# EAGLE board AK4493-Combi9 (EAGLE 9.6.2), part 1 of 2
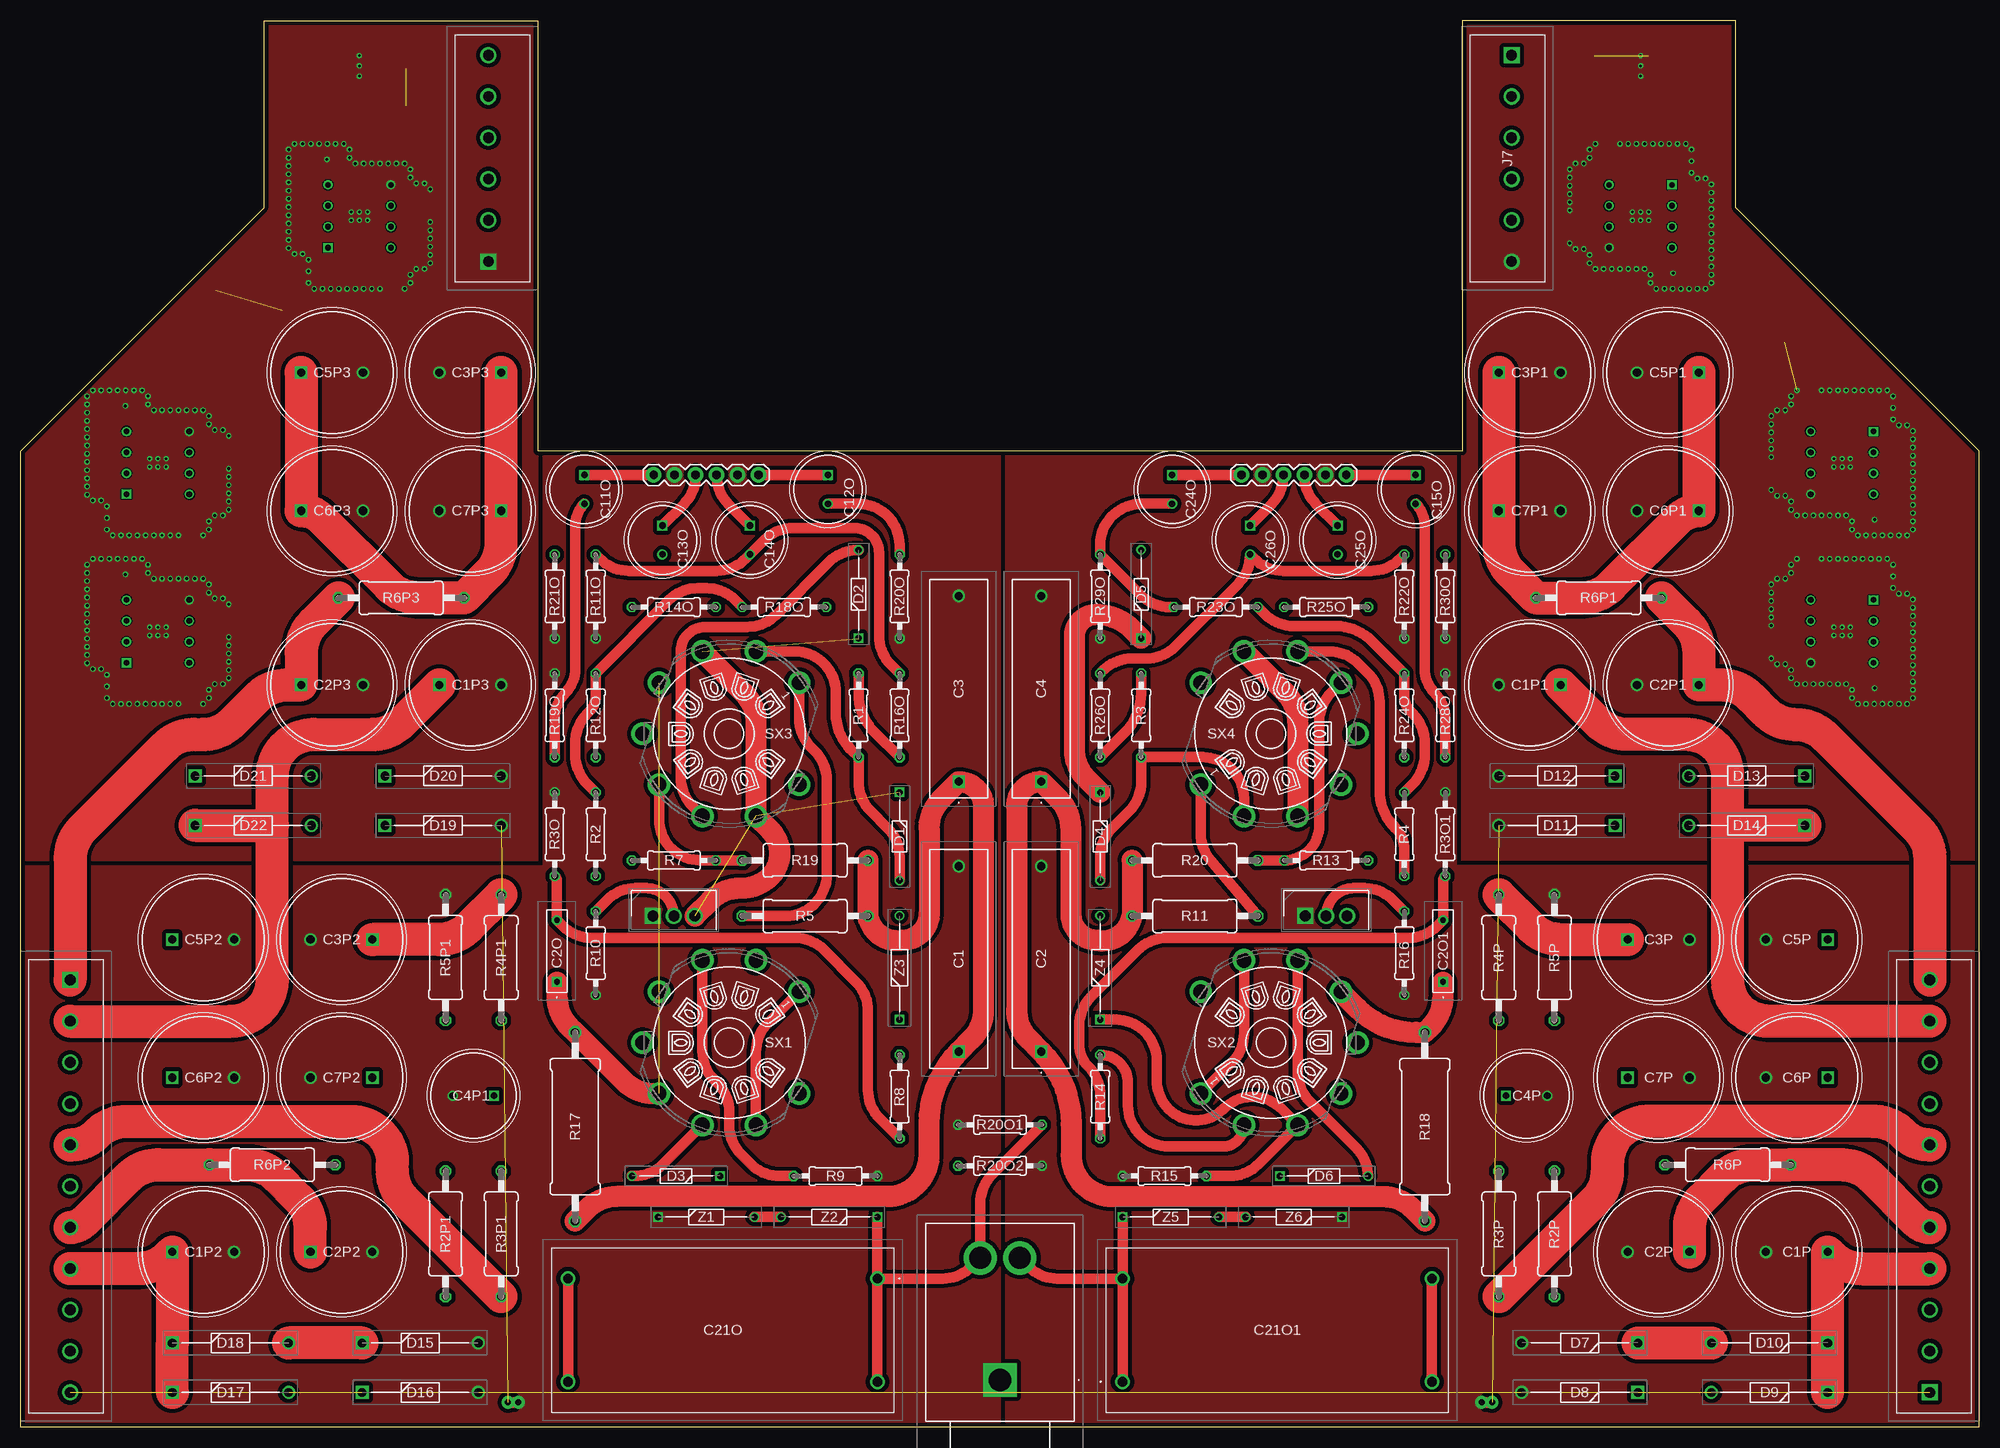
[diagram p0: board, top side]
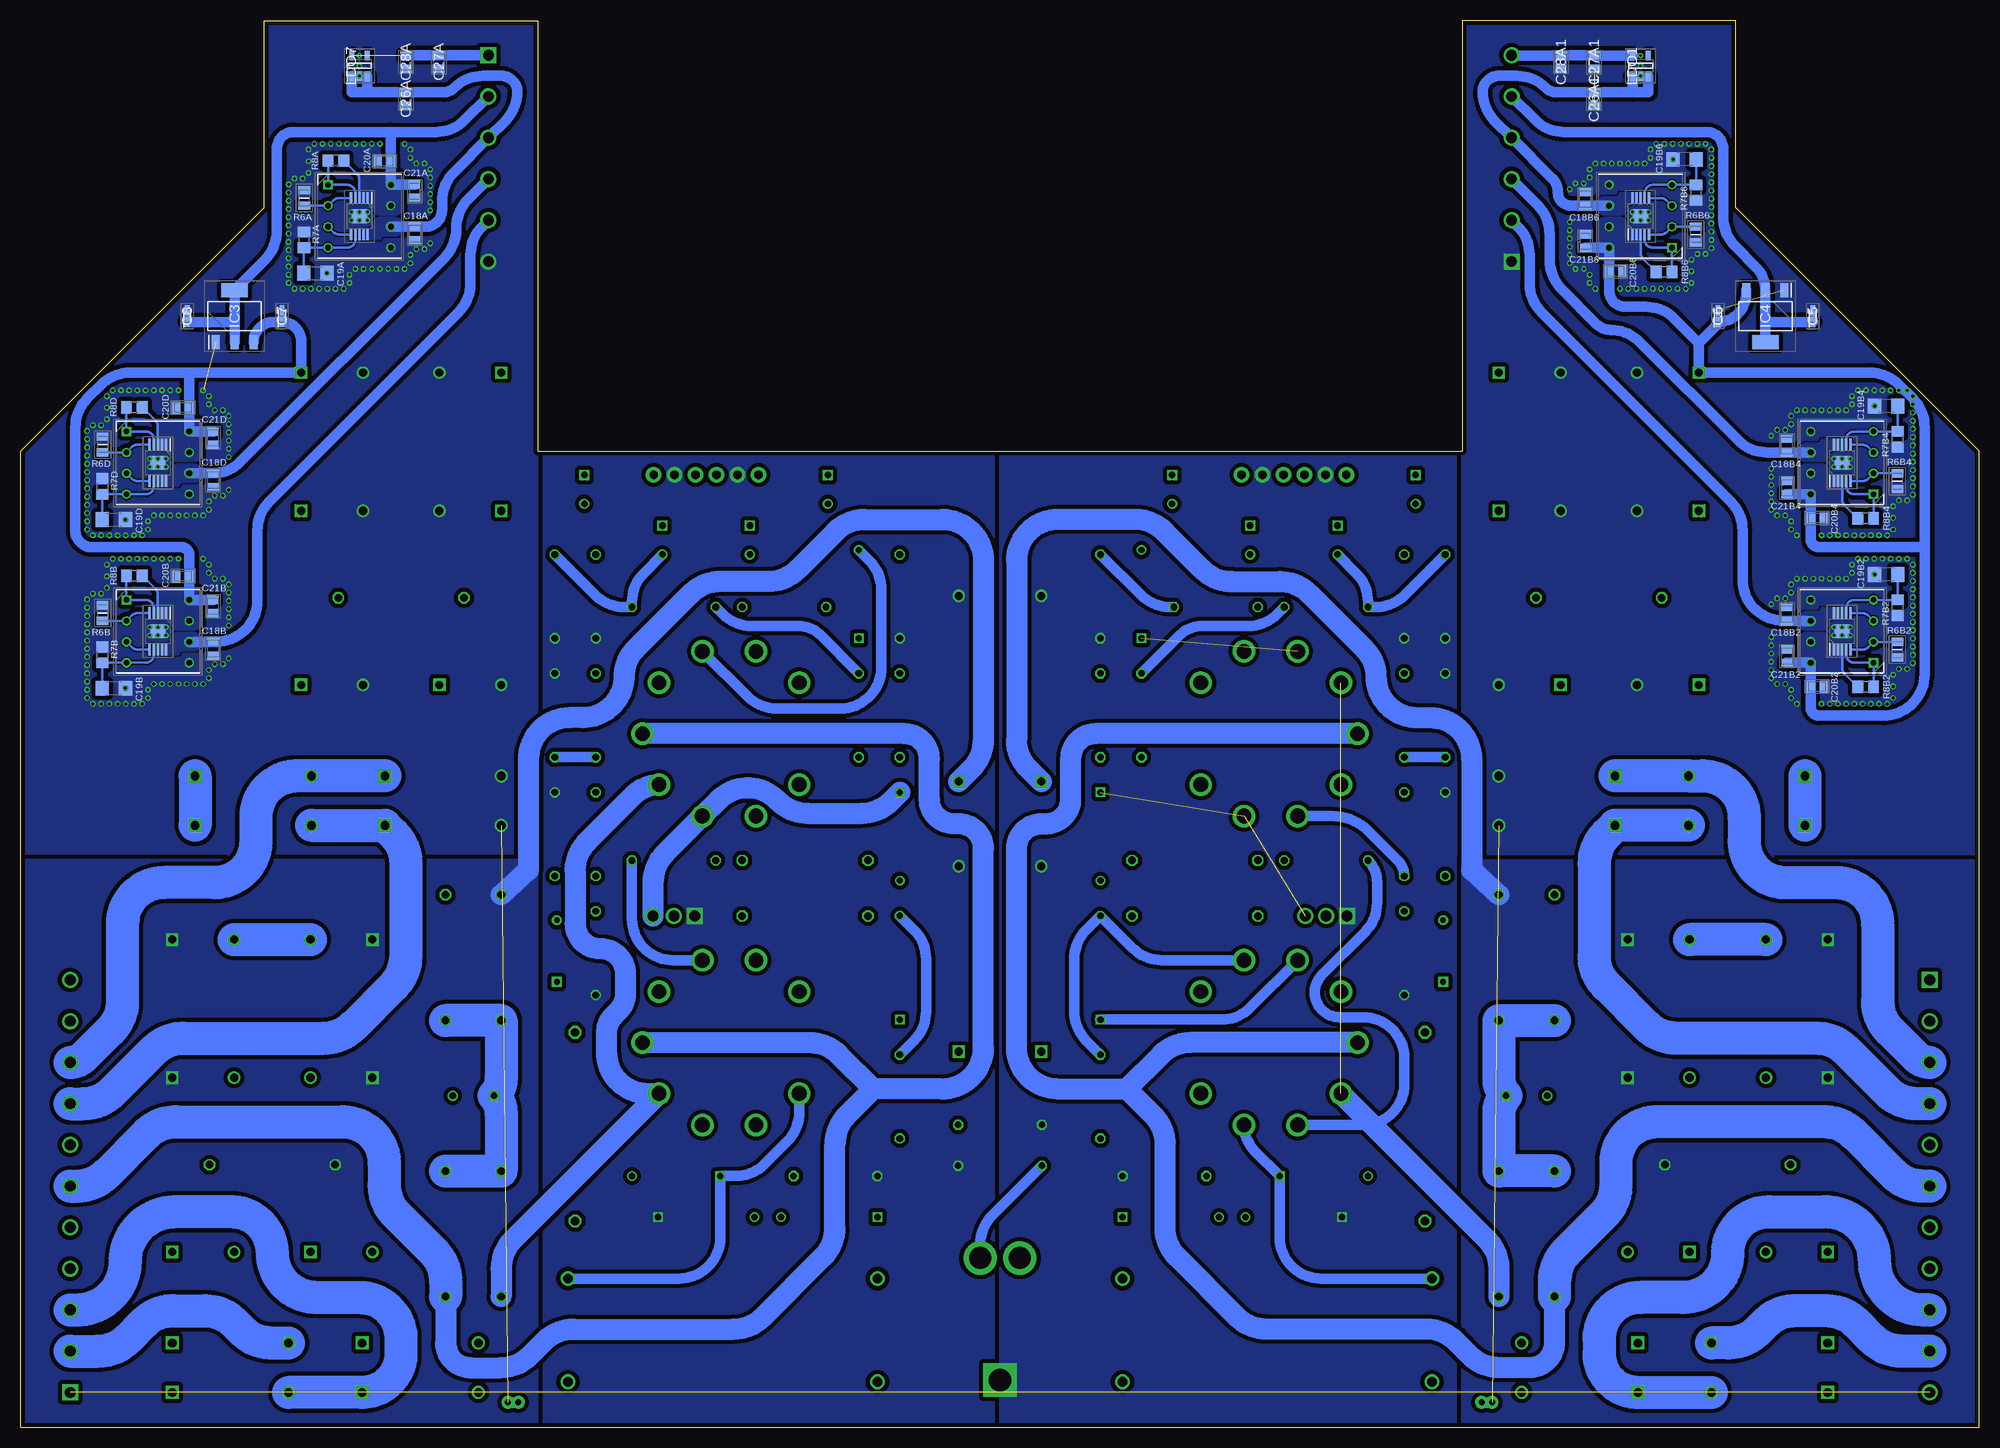
[diagram p1: board, bottom side, seen from below]

Size 237.38 x 170.5 mm. Coordinates in mm from the lower left corner, seen from the top.
Outline: 237.38,0 237.38,118.3 207.83,147.85 207.83,170.5 174.69,170.5 174.69,118.3 62.69,118.3 62.69,170.5 29.55,170.5 29.55,147.85 0,118.3 0,0 237.38,0
Copper layers (1*16): Top 0.035mm / dielectric 1.6mm / Bottom 0.035mm
Design rules "Elecrow_2-layer_PCB_eagle_rule": minimum track width 6mil, minimum drill 12mil, track to track 6mil, track to pad 6mil, pad to pad 6mil, via to via 8mil, smd to smd 0mil, copper to edge 20mil, drill to drill 10mil, minimum pad ring 6mil, minimum via ring 6mil, stop-mask expansion 0mil, vias tented up to drill 100mil, thermal gap 10mil
Net classes: 1 Signal: width 1.27 mm; 2 Power: width 2.54 mm

## Footprints (pad centres in the part's own frame; a part is rotated, then mirrored left to right if it is on the bottom)
MKP4G034705D00KSSD = drill 1 pad 1.5 square: 1 0,0 | drill 1 pad 1.5: 2 22.5,0
CAPPRD750W80D1475H4700 = drill 1 pad 1.5 square: 1 0,0 | drill 1 pad 1.5: 2 7.5,0
MKS4B031002A00JC00 = drill 0.7 pad 1.2 square: 1 0,0 | drill 0.7 pad 1.2: 2 7.5,0
CAPPRD500W60D1025H1750 = drill 0.8 pad 1.2 square: 1 0,0 | drill 0.8 pad 1.2: 2 5,0
CAPPM168X90N = smd 1.3 x 0.6: 1 -0.7,0; 2 0.7,0
CAPPRD350W60D825H1300 = drill 0.8 pad 1.2 square: 1 0,0 | drill 0.8 pad 1.2: 2 3.5,0
CAPC2013X140N = smd 0.96 x 1.44: 1 -0.82,0; 2 0.82,0
C1206 = smd 1.6 x 1.8: 1 -1.4,0; 2 1.4,0 | drill 0.35: DGND 1.4,0
CAPC2012X135N = smd 0.96 x 1.39: 1 -0.79,0; 2 0.79,0
DCP4G056007GD4KSSD = drill 1.2 pad 1.8: 1 0,0; 2 37.5,0; 3 37.5,12.5; 4 0,12.5
DIOAD1068W53L380D172 = drill 0.75 pad 1.15 square: 1 0,0 | drill 0.75 pad 1.15: 2 10.7,0
DIOAD1405W86L465D235 = drill 1.05 pad 1.575 square: 1 0,0 | drill 1.05 pad 1.575: 2 14.1,0
SOP50P490X110-11N = smd 1.425 x 0.3: 1 -2.212,1; 2 -2.212,0.5; 3 -2.212,0; 4 -2.212,-0.5; 5 -2.212,-1; 6 2.212,-1; 7 2.212,-0.5; 8 2.212,0; 9 2.212,0.5; 10 2.212,1 | smd 1.68 x 1.88: 11 0,0 | drill 0.305 pad 0.61: P$1 -0.498,0; P$2 0.498,0; P$3 -0.498,0.995; P$4 0.498,0.995; P$5 -0.498,-0.995; P$6 0.498,-0.995
SOT230P700X180-4N = smd 1.75 x 0.95: 1 -3.15,2.3; 2 -3.15,0; 3 -3.15,-2.3 | smd 1.75 x 3.2: 4 3.15,0
DIPS762W51P254L1016H390Q8N = drill 0.7 pad 1.1 square: 1 0,0 | drill 0.7 pad 1.1: 2 0,-2.54; 3 0,-5.08; 4 0,-7.62; 5 7.62,-7.62; 6 7.62,-5.08; 7 7.62,-2.54; 8 7.62,0
1X06 = drill 1.016 pad 1.88: 1 0,0; 2 2.54,0; 3 5.08,0; 4 7.62,0; 5 10.16,0; 6 12.7,0
SJ63033A = drill 2.69 pad 4.035 square: 1 0,0 | drill 2.69 pad 4.035: 2 14.8,-2.4; 3 14.8,2.4
1935255 = drill 1.3 pad 1.95 square: 1 0,0 | drill 1.3 pad 1.95: 2 5,0; 3 10,0; 4 15,0; 5 20,0; 6 25,0; 7 30,0; 8 35,0; 9 40,0; 10 45,0; 11 50,0
1935200 = drill 1.3 pad 1.95 square: 1 0,0 | drill 1.3 pad 1.95: 2 5,0; 3 10,0; 4 15,0; 5 20,0; 6 25,0
SOT95P280X145-5N = smd 1.2 x 0.6: 1 -1.25,0.95; 2 -1.25,0; 3 -1.25,-0.95; 4 1.25,-0.95; 5 1.25,0.95 | drill 0.305 pad 0.61: DGND -1.25,0; DGND2 0,0; DGND3 1.25,0
0207/10 = drill 0.813 octagon: 1 -5.08,0; 2 5.08,0
0411/15 = drill 0.914 octagon: 1 -7.62,0; 2 7.62,0
RESC2012X60N = smd 1 x 1.4: 1 -0.95,0; 2 0.95,0
R0805 = smd 1.3 x 1.5: 1 -0.95,0; 2 0.95,0
0617/22 = drill 1.016 octagon: 1 -11.43,0; 2 11.43,0
SHORT_ALL-50 = drill 0.737 pad 1.524: 1 -0.635,0; 2 0.635,0
VT9-PT = drill 1.8 pad 2.4: 1 6.172,8.495; 2 0,10.5; 3 -6.172,8.495; 4 -9.986,3.245; 5 -9.986,-3.245; 6 -6.172,-8.495; 7 0,-10.5; 8 6.172,-8.495; 9 9.986,-3.244
TO254P482X997X2018-3P = drill 1.29 pad 1.935 square: 1 0,0 | drill 1.29 pad 1.935: 2 2.54,0; 3 5.08,0
DIOAD1165W56L425D185 = drill 0.75 pad 1.15 square: 1 0,0 | drill 0.75 pad 1.15: 2 11.7,0
DIOAD1256W56L444D203 = drill 0.75 pad 1.15 square: 1 0,0 | drill 0.75 pad 1.15: 2 12.6,0

## Placement (x,y rotation side)
C1  MKP4G034705D00KSSD  [MKP4G034705D00KSSD]  113.69,45.5 90 top
C1P  68u  [CAPPRD750W80D1475H4700]  219,21.23 180 top
C1P1  68u  [CAPPRD750W80D1475H4700]  186.63,89.97 180 top
C1P2  68u  [CAPPRD750W80D1475H4700]  18.38,21.23 0 top
C1P3  68u  [CAPPRD750W80D1475H4700]  50.74,89.97 0 top
C2  MKP4G034705D00KSSD  [MKP4G034705D00KSSD]  123.69,45.5 90 top
C2O  0.1uF, 35V  [MKS4B031002A00JC00]  64.99,53.95 90 top
C2O1  0.1uF, 35V  [MKS4B031002A00JC00]  172.39,53.95 90 top
C2P  68u  [CAPPRD750W80D1475H4700]  202.25,21.23 180 top
C2P1  68u  [CAPPRD750W80D1475H4700]  203.38,89.97 180 top
C2P2  68u  [CAPPRD750W80D1475H4700]  35.12,21.23 0 top
C2P3  68u  [CAPPRD750W80D1475H4700]  33.99,89.97 0 top
C3  MKP4G034705D00KSSD  [MKP4G034705D00KSSD]  113.69,78.25 90 top
C3P  68u  [CAPPRD750W80D1475H4700]  194.75,59.1 0 top
C3P1  68u  [CAPPRD750W80D1475H4700]  179.13,127.83 0 top
C3P2  68u  [CAPPRD750W80D1475H4700]  42.62,59.1 180 top
C3P3  68u  [CAPPRD750W80D1475H4700]  58.24,127.83 180 top
C4  MKP4G034705D00KSSD  [MKP4G034705D00KSSD]  123.69,78.25 90 top
C4P  UCY2E220MPD1TD  [CAPPRD500W60D1025H1750]  180,40.16 0 top
C4P1  UCY2E220MPD1TD  [CAPPRD500W60D1025H1750]  57.37,40.16 180 top
C5  TCM1A106M8R  [CAPPM168X90N]  20.19,134.68 90 bottom
C5P  68u  [CAPPRD750W80D1475H4700]  219,59.1 180 top
C5P1  68u  [CAPPRD750W80D1475H4700]  203.38,127.83 180 top
C5P2  68u  [CAPPRD750W80D1475H4700]  18.38,59.1 0 top
C5P3  68u  [CAPPRD750W80D1475H4700]  33.99,127.83 0 top
C6  TCM1A106M8R  [CAPPM168X90N]  31.68,134.68 90 bottom
C6P  68u  [CAPPRD750W80D1475H4700]  219,42.35 180 top
C6P1  68u  [CAPPRD750W80D1475H4700]  203.38,111.08 180 top
C6P2  68u  [CAPPRD750W80D1475H4700]  18.38,42.35 0 top
C6P3  68u  [CAPPRD750W80D1475H4700]  33.99,111.08 0 top
C7  TCM1A106M8R  [CAPPM168X90N]  205.7,134.68 90 bottom
C7P  68u  [CAPPRD750W80D1475H4700]  194.75,42.35 0 top
C7P1  68u  [CAPPRD750W80D1475H4700]  179.13,111.08 0 top
C7P2  68u  [CAPPRD750W80D1475H4700]  42.62,42.35 180 top
C7P3  68u  [CAPPRD750W80D1475H4700]  58.24,111.08 180 top
C8  TCM1A106M8R  [CAPPM168X90N]  217.19,134.68 90 bottom
C11O  100uF  [CAPPRD350W60D825H1300]  68.31,115.42 270 top
C12O  100uF  [CAPPRD350W60D825H1300]  97.84,115.42 270 top
C13O  100uF  [CAPPRD350W60D825H1300]  77.77,109.28 270 top
C14O  100uF  [CAPPRD350W60D825H1300]  88.38,109.28 270 top
C15O  100uF  [CAPPRD350W60D825H1300]  169.06,115.42 270 top
C18A  4.7u  [CAPC2013X140N]  189.62,144.69 270 bottom
C18B  4.7u  [CAPC2013X140N]  214.05,94.37 270 bottom
C18B2  4.7u  [CAPC2013X140N]  23.33,98.55 90 bottom
C18B4  4.7u  [CAPC2013X140N]  23.33,118.98 90 bottom
C18B6  4.7u  [CAPC2013X140N]  47.75,148.87 90 bottom
C18D  4.7u  [CAPC2013X140N]  214.05,114.8 270 bottom
C19A  22u  [C1206]  201.66,139.89 0 bottom
C19B  22u  [C1206]  226.08,89.57 0 bottom
C19B2  22u  [C1206]  11.3,103.36 180 bottom
C19B4  22u  [C1206]  11.3,123.78 180 bottom
C19B6  22u  [C1206]  35.72,153.68 180 bottom
C19D  22u  [C1206]  226.08,109.99 0 bottom
C20A  10u  [CAPC2012X135N]  193.29,153.47 180 bottom
C20B  10u  [CAPC2012X135N]  217.72,103.16 180 bottom
C20B2  10u  [CAPC2012X135N]  19.66,89.77 0 bottom
C20B4  10u  [CAPC2012X135N]  19.66,110.2 0 bottom
C20B6  10u  [CAPC2012X135N]  44.08,140.09 0 bottom
C20D  10u  [CAPC2012X135N]  217.72,123.58 180 bottom
C21A  0.1u  [CAPC2012X135N]  189.62,149.8 270 bottom
C21B  0.1u  [CAPC2012X135N]  214.05,99.48 270 bottom
C21B2  0.1u  [CAPC2012X135N]  23.33,93.44 90 bottom
C21B4  0.1u  [CAPC2012X135N]  23.33,113.87 90 bottom
C21B6  0.1u  [CAPC2012X135N]  47.75,143.76 90 bottom
C21D  0.1u  [CAPC2012X135N]  214.05,119.91 270 bottom
C21O  30uF/400V  [DCP4G056007GD4KSSD]  103.84,18 180 top
C21O1  30uF/400V  [DCP4G056007GD4KSSD]  133.54,5.5 0 top
C24O  100uF  [CAPPRD350W60D825H1300]  139.54,115.42 270 top
C25O  100uF  [CAPPRD350W60D825H1300]  159.61,109.28 270 top
C26A  4.7u, Ceramic Capacitor X7R  [CAPC2013X140N]  190.69,161 270 bottom
C26A1  4.7u, Ceramic Capacitor X7R  [CAPC2013X140N]  46.69,161 270 bottom
C26O  100uF  [CAPPRD350W60D825H1300]  149,109.28 270 top
C27A  4.7u, Ceramic Capacitor X7R  [CAPC2013X140N]  186.69,165.48 270 bottom
C27A1  4.7u, Ceramic Capacitor X7R  [CAPC2013X140N]  46.69,165.48 270 bottom
C28A  0.1u, Ceramic Capacitor X7R  [CAPC2012X135N]  190.69,165.48 270 bottom
C28A1  0.1u, Ceramic Capacitor X7R  [CAPC2012X135N]  50.69,165.48 270 bottom
D1  1N4148-T50R  [DIOAD1068W53L380D172]  106.51,76.95 270 top
D2  1N4148-T50R  [DIOAD1068W53L380D172]  101.54,95.62 90 top
D3  1N4148-T50R  [DIOAD1068W53L380D172]  84.78,30.42 180 top
D4  1N4148-T50R  [DIOAD1068W53L380D172]  130.83,76.95 270 top
D5  1N4148-T50R  [DIOAD1068W53L380D172]  135.8,95.62 90 top
D6  1N4148-T50R  [DIOAD1068W53L380D172]  152.59,30.42 0 top
D7  1N4007FFG  [DIOAD1405W86L465D235]  196,10.2 180 top
D8  1N4007FFG  [DIOAD1405W86L465D235]  196,4.2 180 top
D9  1N4007FFG  [DIOAD1405W86L465D235]  219,4.2 180 top
D10  1N4007FFG  [DIOAD1405W86L465D235]  219,10.2 180 top
D11  1N4007FFG  [DIOAD1405W86L465D235]  193.23,72.94 180 top
D12  1N4007FFG  [DIOAD1405W86L465D235]  193.23,78.94 180 top
D13  1N4007FFG  [DIOAD1405W86L465D235]  216.23,78.94 180 top
D14  1N4007FFG  [DIOAD1405W86L465D235]  216.23,72.94 180 top
D15  1N4007FFG  [DIOAD1405W86L465D235]  41.38,10.2 0 top
D16  1N4007FFG  [DIOAD1405W86L465D235]  41.38,4.2 0 top
D17  1N4007FFG  [DIOAD1405W86L465D235]  18.38,4.2 0 top
D18  1N4007FFG  [DIOAD1405W86L465D235]  18.38,10.2 0 top
D19  1N4007FFG  [DIOAD1405W86L465D235]  44.14,72.94 0 top
D20  1N4007FFG  [DIOAD1405W86L465D235]  44.14,78.94 0 top
D21  1N4007FFG  [DIOAD1405W86L465D235]  21.14,78.94 0 top
D22  1N4007FFG  [DIOAD1405W86L465D235]  21.14,72.94 0 top
IC1  LT3042  [SOP50P490X110-11N]  220.74,116.89 270 bottom
IC2  LT3042  [SOP50P490X110-11N]  196.31,146.78 270 bottom
IC3  LM1117MPX-5.0_NOPB  [SOT230P700X180-4N]  211.44,134.68 90 bottom
IC4  LM1117MPX-5.0_NOPB  [SOT230P700X180-4N]  25.93,134.68 270 bottom
IC5  LT3042  [SOP50P490X110-11N]  220.74,96.46 270 bottom
IC6  LT3042  [SOP50P490X110-11N]  16.64,96.46 90 bottom
IC8  LT3042  [SOP50P490X110-11N]  16.64,116.89 90 bottom
IC10  LT3042  [SOP50P490X110-11N]  41.06,146.78 90 bottom
J1  XR2A-0811-N  [DIPS762W51P254L1016H390Q8N]  224.55,120.7 0 bottom
J2  [1X06]  147.95,115.42 0 top
J3  SJ-63033A  [SJ63033A]  118.69,5.7 90 top
J4  1935255  [1935255]  6,54.2 270 top
J5  XR2A-0811-N  [DIPS762W51P254L1016H390Q8N]  200.12,150.59 0 bottom
J6  1935255  [1935255]  231.38,4.2 90 top
J7  1935200  [1935200]  180.69,166.3 270 top
J8  XR2A-0811-N  [DIPS762W51P254L1016H390Q8N]  12.83,92.65 180 bottom
J9  1935200  [1935200]  56.69,141.3 90 top
J10  XR2A-0811-N  [DIPS762W51P254L1016H390Q8N]  12.83,113.08 180 bottom
J12  XR2A-0811-N  [DIPS762W51P254L1016H390Q8N]  37.25,142.97 180 bottom
J13  [1X06]  89.42,115.42 180 top
J17  XR2A-0811-N  [DIPS762W51P254L1016H390Q8N]  224.55,100.27 0 bottom
LDO1  LP5907-1.8V  [SOT95P280X145-5N]  41.06,165.02 90 bottom
LDO7  LP5907-1.8V  [SOT95P280X145-5N]  196.31,165.02 90 bottom
R1  1k  [0207/10]  101.54,86.28 90 top
R2  1k  [0207/10]  69.69,71.87 90 top
R2P  220  [0411/15]  185.88,23.41 270 top
R2P1  220  [0411/15]  51.5,23.41 270 top
R3  1k  [0207/10]  135.8,86.28 90 top
R3O  1M*  [0207/10]  64.72,71.87 90 top
R3O1  1M*  [0207/10]  172.66,71.87 90 top
R3P  220  [0411/15]  179.13,23.41 90 top
R3P1  220  [0411/15]  58.24,23.41 90 top
R4  1k  [0207/10]  167.69,71.87 90 top
R4P  300k  [0411/15]  179.13,56.91 90 top
R4P1  300k  [0411/15]  58.24,56.91 90 top
R5  15k  [0411/15]  95.07,61.95 0 top
R5P  100k  [0411/15]  185.88,56.91 270 top
R5P1  100k  [0411/15]  51.5,56.91 270 top
R6A  1k  [RESC2012X60N]  203.01,149 90 bottom
R6B  1k  [RESC2012X60N]  227.43,98.68 90 bottom
R6B2  1k  [RESC2012X60N]  9.95,94.24 270 bottom
R6B4  1k  [RESC2012X60N]  9.95,114.67 270 bottom
R6B6  1k  [RESC2012X60N]  34.37,144.56 270 bottom
R6D  1k  [RESC2012X60N]  227.43,119.11 90 bottom
R6P  330  [0411/15]  206.88,31.79 0 top
R6P1  330  [0411/15]  191.26,100.53 0 top
R6P2  330  [0411/15]  30.5,31.79 180 top
R6P3  330  [0411/15]  46.12,100.53 180 top
R7  1k  [0207/10]  79.16,68.7 0 top
R7A  33k  [R0805]  203.06,143.92 90 bottom
R7B  33k  [R0805]  227.48,93.6 90 bottom
R7B2  33k  [R0805]  9.9,99.32 270 bottom
R7B4  33k  [R0805]  9.9,119.75 270 bottom
R7B6  33k  [R0805]  34.32,149.64 270 bottom
R7D  33k  [R0805]  227.48,114.03 90 bottom
R8  1k  [0207/10]  106.51,40.05 270 top
R8A  200k  [R0805]  199.17,153.52 180 bottom
R8B  200k  [R0805]  223.6,103.21 180 bottom
R8B2  200k  [R0805]  13.78,89.72 0 bottom
R8B4  200k  [R0805]  13.78,110.15 0 bottom
R8B6  200k  [R0805]  38.2,140.04 0 bottom
R8D  200k  [R0805]  223.6,123.63 180 bottom
R9  249  [0207/10]  98.76,30.42 180 top
R10  76.8  [0207/10]  69.69,57.45 90 top
R11  15k  [0411/15]  142.31,61.95 180 top
R11O  10k  [0207/10]  69.69,100.7 270 top
R12O  182  [0207/10]  69.69,86.28 270 top
R13  1k  [0207/10]  158.21,68.7 180 top
R14  1k  [0207/10]  130.83,40.05 270 top
R14O  182  [0207/10]  79.16,99.4 180 top
R15  249  [0207/10]  138.62,30.42 0 top
R16  76.8  [0207/10]  167.69,57.45 90 top
R16O  182  [0207/10]  106.51,86.28 90 top
R17  402  [0617/22]  67.2,36.42 90 top
R18  402  [0617/22]  170.17,36.42 270 top
R18O  182  [0207/10]  92.53,99.4 0 top
R19  15k  [0411/15]  95.07,68.7 0 top
R19O  10k  [0207/10]  64.72,86.28 270 top
R20  15k  [0411/15]  142.31,68.7 0 top
R20O  10k  [0207/10]  106.51,100.7 270 top
R20O1  10k  [0207/10]  118.69,36.65 0 top
R20O2  10k  [0207/10]  118.69,31.68 180 top
R21O  10k  [0207/10]  64.72,100.7 90 top
R22O  10k  [0207/10]  167.69,100.7 270 top
R23O  182  [0207/10]  144.85,99.4 180 top
R24O  182  [0207/10]  167.69,86.28 270 top
R25O  182  [0207/10]  158.21,99.4 0 top
R26O  182  [0207/10]  130.83,86.28 90 top
R28O  10k  [0207/10]  172.66,86.28 270 top
R29O  10k  [0207/10]  130.83,100.7 270 top
R30O  10k  [0207/10]  172.66,100.7 90 top
SH1  SHORTA5  [SHORT_ALL-50]  59.69,3 0 top
SH2  SHORTA5  [SHORT_ALL-50]  177.69,3 180 top
SX1  VT9-PT  [VT9-PT]  85.87,46.6 342 top
SX2  VT9-PT  [VT9-PT]  151.51,46.6 162 top
SX3  VT9-PT  [VT9-PT]  85.87,84.05 342 top
SX4  VT9-PT  [VT9-PT]  151.51,84.05 162 top
U1  LM317MTG  [TO254P482X997X2018-3P]  76.62,61.95 0 top
U2  LM317MTG  [TO254P482X997X2018-3P]  155.67,61.95 0 top
Z1  [DIOAD1165W56L425D185]  77.23,25.45 0 top
Z2  [DIOAD1165W56L425D185]  103.84,25.45 180 top
Z3  1N750  [DIOAD1256W56L444D203]  106.51,49.39 90 top
Z4  1N750  [DIOAD1256W56L444D203]  130.83,49.39 90 top
Z5  [DIOAD1165W56L425D185]  133.54,25.45 0 top
Z6  [DIOAD1165W56L425D185]  160.14,25.45 180 top

## Library data of the parts
C1-C4 = Dual Mono Amp Library; DESCRIPTION: 0.47 F Film Capacitor 220V 400V Polypropylene (PP), Metallized Radial; HEIGHT: 16.5mm; MANUFACTURER_NAME: WIMA; MANUFACTURER_PART_NUMBER: MKP4G034705D00KSSD; MOUSER_PART_NUMBER: 505-MKP4G034705DKSSD; MOUSER_PRICE-STOCK: http://www.mouser.com/Search/ProductDetail.aspx?qs=sJjjjplDs9uaOctv9bTMfA%3d%3d
C1P C1P1-C1P3 C2P C2P1-C2P3 C3P C3P1-C3P3 C5P C5P1-C5P3 C6P C6P1-C6P3 C7P C7P1-C7P3 = 500HXW68MEFR14.5X45; DESCRIPTION: Aluminum Electrolytic Capacitors - Radial Leaded GENERAL PURPOSE ELECTROLYTIC CAPACITORS; HEIGHT: 47mm; MANUFACTURER_NAME: Rubycon; MANUFACTURER_PART_NUMBER: 500HXW68MEFR14.5X45
C2O C2O1 = Dual Mono Amp Library; DESCRIPTION: Film Capacitors MKS 4 0.1 uF 50 VDC 2.5x7x10 PCM 7.5; HEIGHT: 7mm; MANUFACTURER_NAME: WIMA; MANUFACTURER_PART_NUMBER: MKS4B031002A00JC00; MOUSER_PART_NUMBER: 505-MKS4B0312AJC; MOUSER_PRICE-STOCK: https://www.mouser.co.uk/ProductDetail/WIMA/MKS4B031002A00JC00?qs=2G4irm%2FqADy9MV8AUfKNYA%3D%3D
C4P C4P1 = UCY2E220MPD1TD; DESCRIPTION: Aluminum Electrolytic Capacitors - Radial Leaded 22uF 250V 20% AEC-Q200; HEIGHT: 17.5mm; MANUFACTURER_NAME: Nichicon; MANUFACTURER_PART_NUMBER: UCY2E220MPD1TD; MOUSER_PART_NUMBER: 647-UCY2E220MPD1TD; MOUSER_PRICE-STOCK: https://www.mouser.co.uk/ProductDetail/Nichicon/UCY2E220MPD1TD?qs=JgOBn5pVFooNXIGMeLbPFg%3D%3D
C5-C8 = Dual Mono Amp Library; DESCRIPTION: Tantalum Capacitors - Solid SMD 10 VDC 10 uF 0603 20 % ESR=9 mOhms; HEIGHT: 0.9mm; MANUFACTURER_NAME: Kyocera AVX; MANUFACTURER_PART_NUMBER: TCM1A106M8R; MOUSER_PART_NUMBER: 755-TCM1A106M8R; MOUSER_PRICE-STOCK: https://www.mouser.co.uk/ProductDetail/KYOCERA-AVX/TCM1A106M8R?qs=Z4wLSx0Y7o51yvfoDMdJcQ%3D%3D
C11O C12O C13O C14O C15O C24O C25O C26O = Dual Mono Amp Library; ARROW_PART_NUMBER: UFW1H101MPD1TD; ARROW_PRICE-STOCK: https://www.arrow.com/en/products/ufw1h101mpd1td/nichicon; DESCRIPTION: Aluminum Electrolytic Capacitors - Radial Leaded 100uF 50 Volts 20%; HEIGHT: 13mm; MANUFACTURER_NAME: Nichicon; MANUFACTURER_PART_NUMBER: UFW1H101MPD1TD; MOUSER_PART_NUMBER: 647-UFW1H101MPD1TD; MOUSER_PRICE-STOCK: https://www.mouser.co.uk/ProductDetail/Nichicon/UFW1H101MPD1TD?qs=WJSLByB5Mu30jPPJ2KiG3A%3D%3D
C18A C18B C18B2 C18B4 C18B6 C18D C26A C26A1 C27A C27A1 = Dual Mono Amp Library; DESCRIPTION: Taiyo Yuden 4.7uF Multilayer Ceramic Capacitor MLCC 16V dc +/-10% X5R Dielectric 0805 SMD, Max. Temp. +85C; HEIGHT: 1.4mm; MANUFACTURER_NAME: TAIYO YUDEN; MANUFACTURER_PART_NUMBER: EMK212ABJ475KG-T; MOUSER_PART_NUMBER: 963-EMK212ABJ475KG-T; MOUSER_PRICE-STOCK: https://www.mouser.co.uk/ProductDetail/Taiyo-Yuden/EMK212ABJ475KG-T?qs=Va%252BXcMGJzEtDqSLhA2RQmA%3D%3D
C19A C19B C19B2 C19B4 C19B6 C19D = Dual Mono Amp Library; DESCRIPTION: Multilayer Ceramic Capacitors MLCC - SMD/SMT 22uF 16V X7R +/-20% 1206 Gen Purp; HEIGHT: 1.8mm; MANUFACTURER_NAME: TAIYO YUDEN; MANUFACTURER_PART_NUMBER: EMK316BB7226ML-T; MOUSER_PART_NUMBER: 963-EMK316BB7226ML-T; MOUSER_PRICE-STOCK: https://www.mouser.co.uk/ProductDetail/TAIYO-YUDEN/EMK316BB7226ML-T?qs=EPmvyOv1YlPvyo1ebMxtFg%3D%3D
C20A C20B C20B2 C20B4 C20B6 C20D = Dual Mono Amp Library; DESCRIPTION: Multilayer Ceramic Capacitors MLCC - SMD/SMT 10uF 16V X7R 10% 0805; HEIGHT: 1.35mm; MANUFACTURER_NAME: TAIYO YUDEN; MANUFACTURER_PART_NUMBER: EMK212BB7106KG-T; MOUSER_PART_NUMBER: 963-EMK212BB7106KG-T; MOUSER_PRICE-STOCK: https://www.mouser.co.uk/ProductDetail/TAIYO-YUDEN/EMK212BB7106KG-T?qs=vF%252B8ahGVilemLVRka0hELA%3D%3D
C21A C21B C21B2 C21B4 C21B6 C21D C28A C28A1 = Dual Mono Amp Library; DESCRIPTION: Multilayer Ceramic Capacitors MLCC - SMD/SMT 0805 16VDC 0.1uF 10% X7R AEC-Q200; HEIGHT: 1.35mm; MANUFACTURER_NAME: TAIYO YUDEN; MANUFACTURER_PART_NUMBER: EMF212B7104KGHT; MOUSER_PART_NUMBER: 963-EMF212B7104KGHT; MOUSER_PRICE-STOCK: https://www.mouser.co.uk/ProductDetail/Taiyo-Yuden/EMF212B7104KGHT?qs=%252B6g0mu59x7JRGtoE3odDgw%3D%3D
C21O C21O1 = Dual Mono Amp Library; DESCRIPTION: Metallized Polypropylene Capacitor; HEIGHT: 39.5mm; MANUFACTURER_NAME: WIMA; MANUFACTURER_PART_NUMBER: DCP4G056007GD4KSSD; MOUSER_PART_NUMBER: 505-DCP4G056007GD4KS; MOUSER_PRICE-STOCK: https://www.mouser.co.uk/ProductDetail/WIMA/DCP4G056007GD4KSSD?qs=RB4whv9F6ryIMjVzuPTkgw%3D%3D
D1-D6 = Dual Mono Amp Library; DESCRIPTION: Diodes - General Purpose, Power, Switching Hi Conductance Fast; HEIGHT: mm; MANUFACTURER_NAME: onsemi; MANUFACTURER_PART_NUMBER: 1N4148-T50R; MOUSER_PART_NUMBER: 512-1N4148T50R; MOUSER_PRICE-STOCK: https://www.mouser.co.uk/ProductDetail/onsemi-Fairchild/1N4148-T50R?qs=0lQeLiL1qyZS6rosZp7Ehg%3D%3D
D7-D22 = 1N4007FFG; DESCRIPTION: Rectifiers 1000V 1A Standard; HEIGHT: mm; MANUFACTURER_NAME: onsemi; MANUFACTURER_PART_NUMBER: 1N4007FFG; MOUSER_PART_NUMBER: 863-1N4007FFG; MOUSER_PRICE-STOCK: https://www.mouser.co.uk/ProductDetail/onsemi/1N4007FFG?qs=y2kkmE52mdPFE87Rxbyfgw%3D%3D
IC1 IC2 IC5 IC6 IC8 IC10 = Dual Mono Amp Library; DESCRIPTION: LINEAR TECHNOLOGY - LT3042EMSE#PBF - LDO, ADJ, 0.2A, 0V-15V, MSOP-10; HEIGHT: 1.1mm; MANUFACTURER_NAME: Linear Technology; MANUFACTURER_PART_NUMBER: LT3042EMSE#PBF; MOUSER_PART_NUMBER: 584-LT3042EMSE#PBF; MOUSER_PRICE-STOCK: https://www.mouser.co.uk/ProductDetail/Analog-Devices-Linear-Technology/LT3042EMSEPBF?qs=oahfZPh6IAJ3XP16d20ITw%3D%3D
IC3 IC4 = Dual Mono Amp Library; DESCRIPTION: Space saving 800-mA low-dropout linear regulator with internal current limit; HEIGHT: 1.8mm; MANUFACTURER_NAME: Texas Instruments; MANUFACTURER_PART_NUMBER: LM1117MPX-5.0/NOPB; MOUSER_PART_NUMBER: 926-LM1117MPX5.0NOPB; MOUSER_PRICE-STOCK: https://www.mouser.co.uk/ProductDetail/Texas-Instruments/LM1117MPX-5.0-NOPB?qs=X1J7HmVL2ZE1O12Qsl7F9g%3D%3D
J1 J5 J8 J10 J12 J17 = XR2A-0811-N; ARROW_PART_NUMBER: XR2A-0811-N; ARROW_PRICE-STOCK: https://www.arrow.com/en/products/xr2a-0811-n/omron?region=nac; DESCRIPTION: IC & Component Sockets Socket DIP Term 8P 7.62mm .25AuPlate; HEIGHT: 3.9mm; MANUFACTURER_NAME: Omron Electronics; MANUFACTURER_PART_NUMBER: XR2A-0811-N; MOUSER_PART_NUMBER: 653-XR2A-0811-N; MOUSER_PRICE-STOCK: https://www.mouser.co.uk/ProductDetail/Omron-Electronics/XR2A-0811-N?qs=WOBxwZpV8jWLu7CcbwkK0Q%3D%3D
J2 J13 = Dual Mono Amp Library; PROD_ID: CONN-08437
J3 = Dual Mono Amp Library; DESCRIPTION: 6.35 mm, Stereo, Right Angle, Through Hole Mount, 3 Conductors, 0 Internal Switches, Audio Jack Connector; HEIGHT: 12.3mm; MANUFACTURER_NAME: CUI Devices; MANUFACTURER_PART_NUMBER: SJ-63033A
J4 = 1935255; DESCRIPTION: Phoenix Contact PT 1.5/11-5.0-H PCB Terminal Block, 11 Way/Pole, Screw Terminals, 26 14 AWG Through Hole,; HEIGHT: 11.55mm; MANUFACTURER_NAME: Phoenix Contact; MANUFACTURER_PART_NUMBER: 1935255; MOUSER_PART_NUMBER: 651-1935255; MOUSER_PRICE-STOCK: https://www.mouser.co.uk/ProductDetail/Phoenix-Contact/1935255?qs=wd%252Bw3mUqFrm1E513uD0TOQ%3D%3D
J6 = Dual Mono Amp Library; DESCRIPTION: Phoenix Contact PT 1.5/11-5.0-H PCB Terminal Block, 11 Way/Pole, Screw Terminals, 26 14 AWG Through Hole,; HEIGHT: 11.55mm; MANUFACTURER_NAME: Phoenix Contact; MANUFACTURER_PART_NUMBER: 1935255; MOUSER_PART_NUMBER: 651-1935255; MOUSER_PRICE-STOCK: https://www.mouser.co.uk/ProductDetail/Phoenix-Contact/1935255?qs=wd%252Bw3mUqFrm1E513uD0TOQ%3D%3D
J7 = Dual Mono Amp Library; DESCRIPTION: Fixed Terminal Blocks PT 1.5/6-5.0-H; HEIGHT: 11.55mm; MANUFACTURER_NAME: Phoenix Contact; MANUFACTURER_PART_NUMBER: 1935200; MOUSER_PART_NUMBER: 651-1935200; MOUSER_PRICE-STOCK: https://www.mouser.co.uk/ProductDetail/Phoenix-Contact/1935200?qs=8BCRtFWWXOTOyOTMiNRITA%3D%3D
J9 = 1935200; DESCRIPTION: Fixed Terminal Blocks PT 1.5/6-5.0-H; HEIGHT: 11.55mm; MANUFACTURER_NAME: Phoenix Contact; MANUFACTURER_PART_NUMBER: 1935200; MOUSER_PART_NUMBER: 651-1935200; MOUSER_PRICE-STOCK: https://www.mouser.co.uk/ProductDetail/Phoenix-Contact/1935200?qs=8BCRtFWWXOTOyOTMiNRITA%3D%3D
LDO1 LDO7 = Dual Mono Amp Library; ARROW_PART_NUMBER: LP5907MFX-1.8/NOPB; ARROW_PRICE-STOCK: https://www.arrow.com/en/products/lp5907mfx-1.8nopb/texas-instruments?region=nac; DESCRIPTION: 250-mA ultra-low-noise low-IQ low-dropout (LDO) linear regulator; HEIGHT: 1.45mm; MANUFACTURER_NAME: Texas Instruments; MANUFACTURER_PART_NUMBER: LP5907MFX-1.8/NOPB; MOUSER_PART_NUMBER: 595-LP5907MFX-1.8NPB; MOUSER_PRICE-STOCK: https://www.mouser.co.uk/ProductDetail/Texas-Instruments/LP5907MFX-1.8-NOPB?qs=biyDIajrTn5jh5ArkSZeqw%3D%3D
R1-R4 R7 R8 R13 R14 = Dual Mono Amp Library; DESCRIPTION: Body Features: Lead Type Axial-Leaded | Configuration Features: Number of Resistors 1 | Dimensions: Passive Component Dimensions 6.2 x 2.3 MM | Electrical Characteristics: Passive Component Tolerance 1 PCT | Resistance Value 1K OHM | Operating Voltage 350 V | Power Rating .6 WATT | Resistance Class 1k 1M | Packaging Features: Packaging Method Ammo Packed | Product Type Features: Element Type Thin Film | Resistor Type General Purpose Resistor | Termination Features: Termination Area Base Material Cop; HEIGHT: mm; MANUFACTURER_NAME: TE Connectivity; MANUFACTURER_PART_NUMBER: LR1F1K0; MOUSER_PART_NUMBER: 279-LR1F1K0; MOUSER_PRICE-STOCK: https://www.mouser.co.uk/ProductDetail/TE-Connectivity-Holsworthy/LR1F1K0?qs=ip69W3eHERVhMxNSZkerTg%3D%3D
R2P R2P1 R3P R3P1 R4P R4P1 R5P R5P1 R6P R6P1-R6P3 = rcl; SPICEPREFIX: R
R3O R3O1 = Dual Mono Amp Library; DESCRIPTION: TE Connectivity Axial Metal Film Resistor 1m +/-1% 0.6W +/-50ppm/C; HEIGHT: mm; MANUFACTURER_NAME: TE Connectivity; MANUFACTURER_PART_NUMBER: LR1F1M0; MOUSER_PART_NUMBER: 279-LR1F1M0; MOUSER_PRICE-STOCK: https://www.mouser.co.uk/ProductDetail/TE-Connectivity-Holsworthy/LR1F1M0?qs=ip69W3eHERVt%2FmQVAugcSg%3D%3D
R5 R11 R19 R20 = Dual Mono Amp Library; DESCRIPTION: VISHAY - CPF215K000FKE14 - Through Hole Resistor, 15 kohm, CPF Series, 2 W, +/- 1%, Axial Leaded, 500 V; HEIGHT: mm; MANUFACTURER_NAME: Vishay; MANUFACTURER_PART_NUMBER: CPF215K000FKE14; MOUSER_PART_NUMBER: 71-CPF2-F-15K-E3; MOUSER_PRICE-STOCK: https://www.mouser.com/ProductDetail/71-CPF2-F-15K-E3
R6A R6B R6B2 R6B4 R6B6 R6D = Dual Mono Amp Library; DESCRIPTION: BOURNS - CHP0805-FX-1001ELF - SMD Chip Resistor, 0805 [2012 Metric], 1 kohm, CHP Series, 200 V, Thick Film, 500 mW; HEIGHT: 0.6mm; MANUFACTURER_NAME: Bourns; MANUFACTURER_PART_NUMBER: CHP0805-FX-1001ELF; MOUSER_PART_NUMBER: 652-CHP0805FX1001ELF; MOUSER_PRICE-STOCK: https://www.mouser.co.uk/ProductDetail/Bourns/CHP0805-FX-1001ELF?qs=lc2O%252BfHJPVYkHmuBCgSoNQ%3D%3D
R7A R7B R7B2 R7B4 R7B6 R7D = Dual Mono Amp Library; DESCRIPTION: NEOHM - TE CONNECTIVITY - CPF0805B51KE1 - SMD Chip Resistor, 51 kohm, +/- 0.1%, 100 mW, 0805 [2012 Metric], Thin Film, Precision Low TCR; HEIGHT: 0.65mm; MANUFACTURER_NAME: TE Connectivity; MANUFACTURER_PART_NUMBER: CPF0805B51KE1; MOUSER_PART_NUMBER: 279-CPF0805B51KE1; MOUSER_PRICE-STOCK: https://www.mouser.co.uk/ProductDetail/TE-Connectivity-Holsworthy/CPF0805B51KE1?qs=iJVBkmKXgrkfOCLIw017vA%3D%3D
R8A R8B R8B2 R8B4 R8B6 R8D = Dual Mono Amp Library; DESCRIPTION: RESISTOR, 0805 200 KOhm +/- 0.5% 0.1 W; HEIGHT: mm; MANUFACTURER_NAME: Susumu; MANUFACTURER_PART_NUMBER: RR1220P-204-D; MOUSER_PART_NUMBER: 754-RR1220P-204D; MOUSER_PRICE-STOCK: https://www.mouser.com/Search/Refine.aspx?Keyword=754-RR1220P-204D
R9 R15 = Dual Mono Amp Library; DESCRIPTION: Metal Film Resistors - Through Hole 249ohm 1% 0.6W Metal Film Resistor; HEIGHT: mm; MANUFACTURER_NAME: VISHAY; MANUFACTURER_PART_NUMBER: MBB02070C2490FRP00
R10 R16 = Dual Mono Amp Library; DESCRIPTION: Body Features: Lead Type Axial-Leaded | Configuration Features: Number of Resistors 1 | Dimensions: Passive Component Dimensions 6.3 x 2.3 MM | Electrical Characteristics: Resistance Class Up to 1k | Power Rating .25 WATT | Operating Voltage 250 V | Passive Component Tolerance .1 PCT | Resistance Value 76.8 OHM | Packaging Features: Packaging Method Ammo Packed | Product Type Features: Resistor Type Precision Resistor | Element Type Thin Film | Termination Features: Number of Terminations 2 | Termination; HEIGHT: mm; MANUFACTURER_NAME: TE Connectivity; MANUFACTURER_PART_NUMBER: YR1B76R8CC
R11O R19O R20O R20O1 R20O2 R21O R22O R28O R29O R30O = Dual Mono Amp Library; DESCRIPTION: Metal film resistor, 10K 0.6W TE Connectivity LR1F Series Axial Metal Film Resistor 10k; HEIGHT: mm; MANUFACTURER_NAME: TE Connectivity; MANUFACTURER_PART_NUMBER: LR1F10K; MOUSER_PART_NUMBER: 279-LR1F10K; MOUSER_PRICE-STOCK: https://www.mouser.co.uk/ProductDetail/TE-Connectivity-Holsworthy/LR1F10K?qs=ip69W3eHERWDLLWs2Qv0Lg%3D%3D
R12O R14O R16O R18O R23O R24O R25O R26O = Dual Mono Amp Library; DESCRIPTION: Metal Film Resistors - Through Hole 0.6W 1% 182 ohm 50pp m; HEIGHT: mm; MANUFACTURER: Yageo; MANUFACTURER_PART_NUMBER: MF0207FTE52-182R; MOUSER_PART_NUMBER: 603-MF0207FTE52-182R; MOUSER_PRICE-STOCK: https://www.mouser.com/ProductDetail/YAGEO/MF0207FTE52-182R?qs=KUIzHt%2Fe91leK267FaM40g%3D%3D
R17 R18 = Dual Mono Amp Library; DESCRIPTION: Metal Film Resistors - Through Hole 402 OHM 2W 1%; HEIGHT: mm; MANUFACTURER_NAME: VISHAY; MANUFACTURER_PART_NUMBER: RWR80S4020FRB12
SH1 SH2 = Dual Mono Amp Library; BOM: No; DESCRIPTION: Short between two nets
SX1-SX4 = Dual Mono Amp Library
U1 U2 = Dual Mono Amp Library; DESCRIPTION: Internal Short Circuit Current Limiting, Internal Thermal Overload Protection, Output Current in Excess of 500 mA, Output Transistor Safe-Area Compensation, Output Adjustable between 1.2 V and 37 V, Floating Operation for High Voltage Applications, Pb-Free Packages are Available; HEIGHT: 4.82mm; MANUFACTURER_NAME: onsemi; MANUFACTURER_PART_NUMBER: LM317MTG; MOUSER_PART_NUMBER: 863-LM317MTG; MOUSER_PRICE-STOCK: https://www.mouser.co.uk/ProductDetail/onsemi/LM317MTG?qs=2OtswVQKCOHbXYkL9fERIw%3D%3D
Z1 Z2 Z5 Z6 = Dual Mono Amp Library; DESCRIPTION: Nexperia Zener Diode, 16V +/-2 %, +/-5 % 500 mW Through Hole 2-Pin SOD27 (DO-35); HEIGHT: mm; MANUFACTURER_NAME: Nexperia; MANUFACTURER_PART_NUMBER: BZX79-C16,113
Z3 Z4 = Dual Mono Amp Library; DESCRIPTION: Zener Diodes Voltage Regulator; HEIGHT: mm; MANUFACTURER_NAME: Microsemi Corporation; MANUFACTURER_PART_NUMBER: 1N750; MOUSER_PART_NUMBER: 494-1N750(DO-35); MOUSER_PRICE-STOCK: https://www.mouser.co.uk/ProductDetail/Microchip-Microsemi/1N750?qs=Xwz%252BGKGy4sB1rzIdx4SmVg%3D%3D

## Nets
6.3_VAC_BLU/1: D19.1 D22.2 J4.4
6.3_VAC_BLU/2: D11.1 D14.2 J6.8
6.3_VAC_GRN/1: D20.1 D21.2 J4.3
6.3_VAC_GRN/2: D12.1 D13.2 J6.9
66.3VAC/BRN/1: J4.5 R3P1.1 SX1.4 SX3.4
66.3VAC/BRN/2: J6.7 R3P.1 SX2.4 SX4.4
66.3VAC/ORG/1: J4.6 R2P1.2 SX1.5 SX3.5
66.3VAC/ORG/2: J6.6 R2P.2 SX2.5 SX4.5
115_VAC_BLK/1: D15.1 D18.2 J4.10
115_VAC_BLK/2: D7.1 D10.2 J6.2
115_VAC_RED/1: D16.1 D17.2 J4.9
115_VAC_RED/2: D8.1 D9.2 J6.3
+1V8/1: C27A1.1 C28A1.1 J9.6 LDO1.5
+1V8/2: C27A.1 C28A.1 J7.1 LDO7.5
+3V3/1: C18B6.1 C26A1.1 IC10.9 IC10.10 J9.4 J12.6 LDO1.1 LDO1.3
+3V3/2: C18A.1 C26A.1 IC2.9 IC2.10 J5.6 J7.3 LDO7.1 LDO7.3
+5V/L/1: C18D.1 IC1.9 IC1.10 J1.6 J7.4
+5V/L/2: C18B.1 IC5.9 IC5.10 J7.5 J17.6
+5V/L/3: C8.1 C20A.1 C21A.1 IC2.1 IC2.2 IC2.3 IC3.2 IC3.4 J5.7 J5.8 J7.2 R8A.1
+5V/R/1: C18B4.1 IC8.9 IC8.10 J9.3 J10.6
+5V/R/2: C18B2.1 IC6.9 IC6.10 J8.6 J9.2
+5V/R/3: C5.1 IC4.2 IC4.4 J9.5
+240VDC/1: C1.1 C3.1 C3P2.1 C5P2.1 C6P2.1 C7P2.1 R4P1.2 R5.2 R6P2.1 R17.1 R19.2
+240VDC/2: C2.1 C3P.1 C4.1 C5P.1 C6P.1 C7P.1 R4P.2 R6P.1 R11.2 R18.2 R20.1
AGND/1: C1.2 C1P2.2 C2P2.2 C3.2 C3P2.2 C4P1.2 C5P2.2 C6P2.2 C7P2.2 D15.2 D16.2 J3.1 J13.2 J13.5 R3O.2 R5P1.1 R9.1 R10.1 R11O.2 R19O.1 R20O1.1 R20O.2 R21O.1 SH1.2 U1.1 Z1.1
AGND/2: C1P.2 C2.2 C2P.2 C3P.2 C4.2 C4P.2 C5P.2 C6P.2 C7P.2 D7.2 D8.2 J2.2 J2.5 R3O1.2 R5P.1 R15.1 R16.1 R20O2.1 R22O.2 R28O.1 R29O.2 R30O.1 SH2.2 U2.1 Z6.1
DGND/1: C1P3.2 C2P3.2 C3P3.2 C5.2 C5P3.2 C6.2 C6P3.2 C7P3.2 C18B2.2 C18B4.2 C18B6.2 C19B2.2 C19B2.DGND C19B4.2 C19B4.DGND C19B6.2 C19B6.DGND C20B2.2 C20B4.2 C20B6.2 C21B2.2 C21B4.2 C21B6.2 C26A1.2 C27A1.2 C28A1.2 D19.2 D20.2 IC4.1 IC6.8 IC6.11 IC6.P$1 IC6.P$2 IC6.P$3 IC6.P$4 IC6.P$5 IC6.P$6 IC8.8 IC8.11 IC8.P$1 IC8.P$2 IC8.P$3 IC8.P$4 IC8.P$5 IC8.P$6 IC10.8 IC10.11 IC10.P$1 IC10.P$2 IC10.P$3 IC10.P$4 IC10.P$5 IC10.P$6 J8.5 J9.1 J10.5 J12.5 LDO1.2 LDO1.DGND LDO1.DGND2 LDO1.DGND3 R6B2.2 R6B4.2 R6B6.2 R7B2.2 R7B4.2 R7B6.2 SH1.1
DGND/2: C1P1.2 C2P1.2 C3P1.2 C5P1.2 C6P1.2 C7.2 C7P1.2 C8.2 C18A.2 C18B.2 C18D.2 C19A.2 C19A.DGND C19B.2 C19B.DGND C19D.2 C19D.DGND C20A.2 C20B.2 C20D.2 C21A.2 C21B.2 C21D.2 C26A.2 C27A.2 C28A.2 D11.2 D12.2 IC1.8 IC1.11 IC1.P$1 IC1.P$2 IC1.P$3 IC1.P$4 IC1.P$5 IC1.P$6 IC2.8 IC2.11 IC2.P$1 IC2.P$2 IC2.P$3 IC2.P$4 IC2.P$5 IC2.P$6 IC3.1 IC5.8 IC5.11 IC5.P$1 IC5.P$2 IC5.P$3 IC5.P$4 IC5.P$5 IC5.P$6 J1.5 J5.5 J7.6 J17.5 LDO7.2 LDO7.DGND LDO7.DGND2 LDO7.DGND3 R6A.2 R6B.2 R6D.2 R7A.2 R7B.2 R7D.2 SH2.1
L+ [Signal]: R4.2 R23O.1 R24O.1
L- [Signal]: R3.2 R25O.1 R26O.1
L_OUT [Signal]: C21O1.1 C21O1.4 J3.2 R20O2.2 Z5.1
N$1: R7.2 R19.1 SX3.6
N$2: R8.1 SX1.2 Z3.2
N$3: C21O1.2 C21O1.3 D6.1 SX2.1 SX2.8
N$4: D4.2 R3.1 SX4.2
N$5: D5.2 R4.1 SX4.7
N$6: D1.2 R1.1 SX3.2
N$7 [Power]: D4.1 D5.1 SX4.3 SX4.8 U2.3
N$8: R11.1 SX4.1
N$9: R13.2 R20.2 SX4.6
N$10: C11O.1 J13.6
N$11: C11O.2 R12O.2 R19O.2
N$12: C15O.1 J2.6
N$13: D2.2 R2.1 SX3.7
N$14: R14.1 SX2.2 Z4.2
N$15: C12O.1 J13.1
N$16: C2O.2 R3O.1 R8.2
N$17: C2O1.2 R3O1.1 R14.2
N$18: C21O.2 C21O.3 D3.1 SX1.1 SX1.8
N$19: C12O.2 R18O.2 R20O.1
N$20: C15O.2 R24O.2 R28O.2
N$21: C13O.1 J13.4
N$22 [Power]: D1.1 D2.1 SX3.3 SX3.8 U1.3
N$23: D3.2 R7.1 SX1.7
N$24: C14O.1 J13.3
N$25: C14O.2 R11O.1 R16O.2
N$26: R9.2 SX1.3 Z3.1
N$27: R15.2 SX2.3 Z4.1
N$28: C13O.2 R14O.2 R21O.2
N$29: D6.2 R13.1 SX2.7
N$30: C24O.1 J2.1
N$31: C24O.2 R23O.2 R29O.1
N$32: C25O.1 J2.4
N$33: C26O.1 J2.3
N$34: C26O.2 R22O.1 R26O.2
N$35: R5.1 SX3.1
N$36: C25O.2 R25O.2 R30O.2
N$37: R10.2 U1.2
N$38: R16.2 U2.2
N$39 [Power]: C2O.1 R17.2 SX1.6
N$40 [Power]: C2O1.1 R18.1 SX2.6
N$41: Z1.2 Z2.2
N$42: Z5.2 Z6.2
N$43: C1P.1 D9.1 D10.1 J6.4
N$44: C2P.1 J6.5 R6P.2
N$45: C4P.1 R2P.1 R3P.2 R4P.1 R5P.2
N$46: IC5.4 J17.1 R8B.2
N$47: IC5.5 J17.2 R6B.1
N$48: IC5.6 J17.3
N$49: IC1.4 J1.1 R8D.2
N$50: IC1.5 J1.2 R6D.1
N$51: IC1.6 J1.3
N$52: C19D.1 IC1.7 J1.4 R7D.1
N$53: IC2.4 J5.1 R8A.2
N$54: IC2.5 J5.2 R6A.1
N$55: IC2.6 J5.3
N$56: C19A.1 IC2.7 J5.4 R7A.1
N$57: C1P1.1 D13.1 D14.1 J6.10
N$58: C2P1.1 J6.11 R6P1.2
N$59: C1P2.1 D17.1 D18.1 J4.8
N$60: C2P2.1 J4.7 R6P2.2
N$61: C4P1.1 R2P1.1 R3P1.2 R4P1.1 R5P1.2
N$62: C1P3.1 D21.1 D22.1 J4.2
N$63: IC6.4 J8.1 R8B2.2
N$64: C19B2.1 IC6.7 J8.4 R7B2.1
N$65: IC6.5 J8.2 R6B2.1
N$66: IC6.6 J8.3
N$67: C2P3.1 J4.1 R6P3.2
N$71: IC8.4 J10.1 R8B4.2
N$72: C19B4.1 IC8.7 J10.4 R7B4.1
N$73: IC8.5 J10.2 R6B4.1
N$74: IC8.6 J10.3
N$79: IC10.4 J12.1 R8B6.2
N$80: C19B6.1 IC10.7 J12.4 R7B6.1
N$81: IC10.5 J12.2 R6B6.1
N$82: IC10.6 J12.3
N$103: C19B.1 IC5.7 J17.4 R7B.1
PE: J4.11 J6.1
R+ [Signal]: R2.2 R12O.1 R18O.1
R- [Signal]: R1.2 R14O.1 R16O.1
R_OUT [Signal]: C21O.1 C21O.4 J3.3 R20O1.2 Z2.1
VCC/1: C3P3.1 C5P3.1 C6.1 C6P3.1 C7P3.1 C20B2.1 C20B4.1 C20B6.1 C21B2.1 C21B4.1 C21B6.1 IC4.3 IC6.1 IC6.2 IC6.3 IC8.1 IC8.2 IC8.3 IC10.1 IC10.2 IC10.3 J8.7 J8.8 J10.7 J10.8 J12.7 J12.8 R6P3.1 R8B2.1 R8B4.1 R8B6.1
VCC/2: C3P1.1 C5P1.1 C6P1.1 C7.1 C7P1.1 C20B.1 C20D.1 C21B.1 C21D.1 IC1.1 IC1.2 IC1.3 IC3.3 IC5.1 IC5.2 IC5.3 J1.7 J1.8 J17.7 J17.8 R6P1.1 R8B.1 R8D.1